# EAGLE board VCF_v15 (EAGLE 9.7.0)
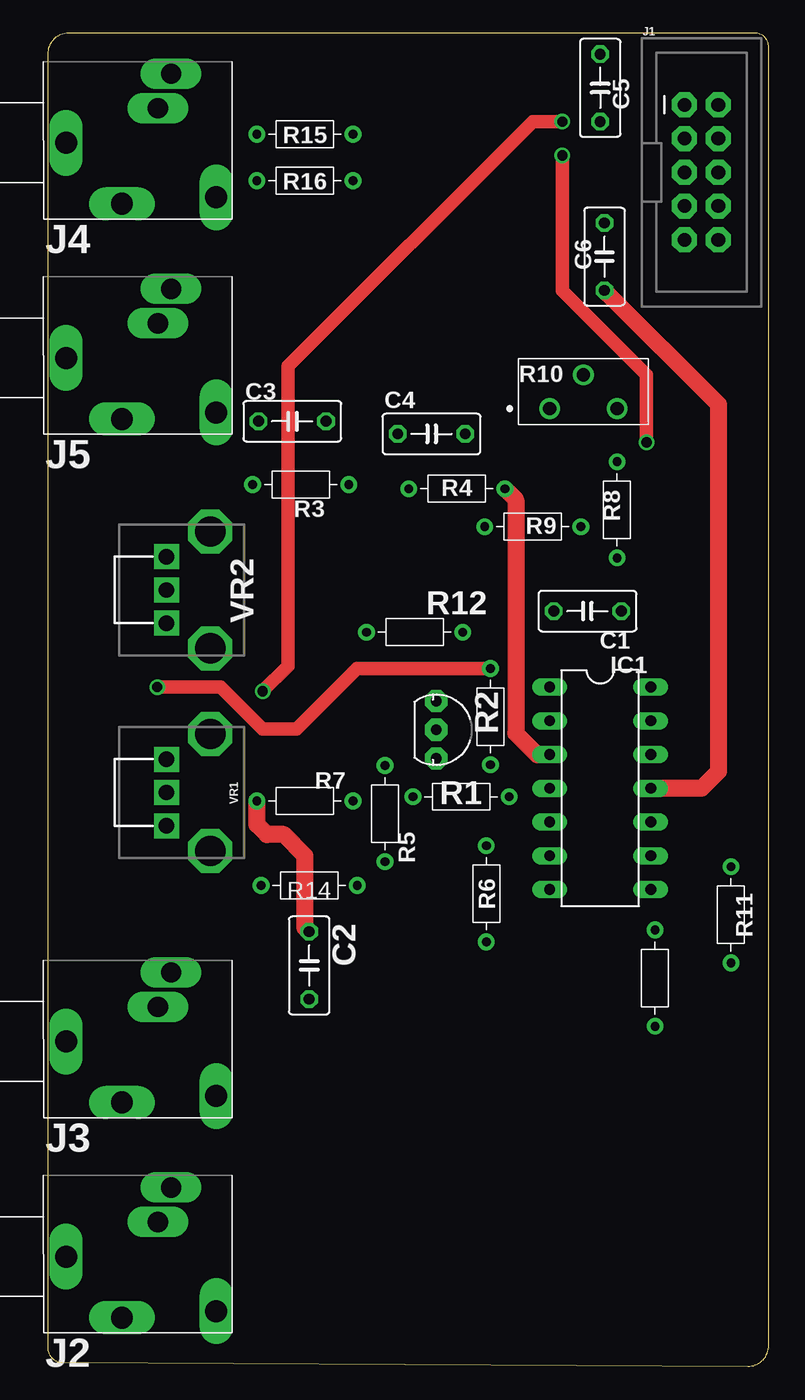
[diagram p0: board, top side]
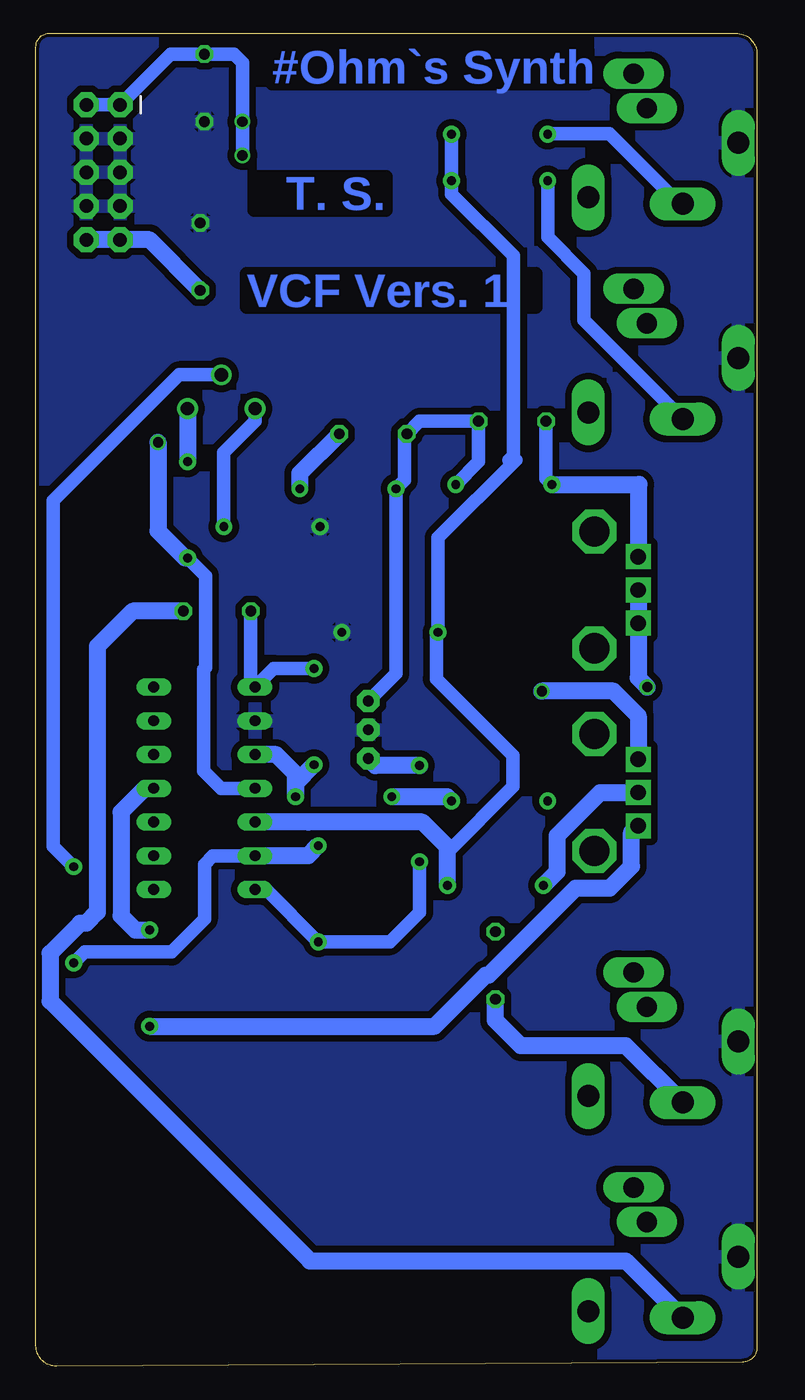
[diagram p1: board, bottom side, seen from below]

Size 54.27 x 100.32 mm. Coordinates in mm from the lower left corner, seen from the top.
Outline: 1.08,0.32 52.71,0 arc90 54.27,1.55 54.27,99.29 arc90 53.24,100.32 1.57,100.32 arc90 0,98.75 0,1.4 arc90 1.08,0.32
Copper layers (1*16): Top 0.035mm / dielectric 1.5mm / Bottom 0.035mm
Design rules "default *": minimum track width 6mil, minimum drill 0.35mm, track to track 20mil, track to pad 20mil, pad to pad 20mil, via to via 20mil, smd to smd 6mil, copper to edge 6mil, drill to drill 6mil, minimum pad ring 10mil, minimum via ring 8mil, stop-mask expansion 4mil, vias tented up to drill 0mil, thermal gap 10mil

## Footprints (pad centres in the part's own frame; a part is rotated, then mirrored left to right if it is on the bottom)
C050-030X075 = drill 0.813 octagon: 1 -2.54,0; 2 2.54,0
DIL14 = drill 0.813 long: 1 -7.62,-3.81; 2 -5.08,-3.81; 3 -2.54,-3.81; 4 0,-3.81; 5 2.54,-3.81; 6 5.08,-3.81; 7 7.62,-3.81; 8 7.62,3.81; 9 5.08,3.81; 10 2.54,3.81; 11 0,3.81; 12 -2.54,3.81; 13 -5.08,3.81; 14 -7.62,3.81
2X5-SHROUDED-NS = drill 1.016 pad 1.88 octagon: 1 -1.27,5.08; 2 1.27,5.08; 3 -1.27,2.54; 4 1.27,2.54; 5 -1.27,0; 6 1.27,0; 7 -1.27,-2.54; 8 1.27,-2.54; 9 -1.27,-5.08; 10 1.27,-5.08
PJ-324M = drill 1.651 pad 1.905 long: 1 -5.4,0; 4 5.9,-4.1; 5 -1.2,-4.6 | drill 1.524 pad 1.778 long: 2 2.5,5.2 | drill 1.524 pad 1.905 long: 3 1.5,2.6
RESAD724W46L381D178B = drill 0.66 pad 1.26: 1 -3.62,0; 2 3.62,0
PV36Z = drill 1 pad 1.564: 1 0,0; 2 2.54,2.54; 3 5.08,0
TO92-INLINE = drill 0.813 pad 1.676 octagon: 1 -2.159,0; 2 0,0; 3 2.159,0
POT-PTH-ALPS = drill 1.143 pad 1.88 square: P$1 7,-2.5; P$2 7,0; P$3 7,2.5 | drill 2.286 octagon: P$4 3.7,-4.4; P$5 3.7,4.4

## Placement (x,y rotation side)
C1  0.1u  [C050-030X075]  40.64,56.83 180 top
C2  0.1u  [C050-030X075]  19.68,30.16 90 top
C3  4.7n  [C050-030X075]  18.41,71.12 0 top
C4  4.7n  [C050-030X075]  28.89,70.17 0 top
C5  10u  [C050-030X075]  41.59,96.2 270 top
C6  10u  [C050-030X075]  41.91,83.5 270 top
IC1  TL074P  [DIL14]  41.59,43.5 270 top
J1  [2X5-SHROUDED-NS]  49.21,89.85 0 top
J2  AUDIO_JACK_PJ-324M  [PJ-324M]  6.79,8.25 0 top
J3  AUDIO_JACK_PJ-324M  [PJ-324M]  6.79,24.45 0 top
J4  AUDIO_JACK_PJ-324M  [PJ-324M]  6.79,92.07 0 top
J5  AUDIO_JACK_PJ-324M  [PJ-324M]  6.79,75.88 0 top
R1  5M  [RESAD724W46L381D178B]  31.11,42.86 180 top
R2  3M  [RESAD724W46L381D178B]  33.34,48.89 90 top
R3  1M  [RESAD724W46L381D178B]  19.05,66.36 0 top
R4  1M  [RESAD724W46L381D178B]  30.8,66.04 0 top
R5  100k  [RESAD724W46L381D178B]  25.4,41.59 270 top
R6  100k  [RESAD724W46L381D178B]  33.02,35.56 270 top
R7  5M  [RESAD724W46L381D178B]  19.37,42.54 180 top
R8  100k  [RESAD724W46L381D178B]  42.86,64.45 90 top
R9  1k  [RESAD724W46L381D178B]  36.51,63.18 0 top
R10  10k  [PV36Z]  37.78,72.07 0 top
R11  10k  [RESAD724W46L381D178B]  51.44,33.97 270 top
R12  1k  [RESAD724W46L381D178B]  27.62,55.24 180 top
R13  50k  [RESAD724W46L381D178B]  45.72,29.21 90 top
R14  150k  [RESAD724W46L381D178B]  19.68,36.19 180 top
R15  100k  [RESAD724W46L381D178B]  19.37,92.71 180 top
R16  150k  [RESAD724W46L381D178B]  19.37,89.22 180 top
U$1  JFET_PN4391_GSD  [TO92-INLINE]  29.25,47.9 270 top
VR1  100k  [POT-PTH-ALPS]  15.94,43.18 180 top
VR2  100k  [POT-PTH-ALPS]  15.94,58.42 180 top

## Library data of the parts
C1-C6 = adafruit
IC1 = linear
J1 = SparkFun-Connectors; PROD_ID: CONN-08671; SF_ID: PRT-08506
J2-J5 = Synthesizer v25
R1-R9 R11-R16 = Resistor; CATEGORY: Resistor; SUB-CATEGORY: Fixed
R10 = Resistor; CATEGORY: Resistor; DESCRIPTION: Lead Sealed Type Multiturn PV36 Series; MANUFACTURER: BOURNS; MPN: PV36Z; OPERATING_TEMPERATURE: -55 to +125 °C; PART_STATUS: Active; ROHS_COMPLIANCE: RoHS Compliant; SERIES: PV36; SUB-CATEGORY: Trimpot; TYPE: Lead Sealed
U$1 = Synthesizer v26
VR1 VR2 = Synthesizer v25; PROD_ID: RES-09177; SF_SKU: COM-09288

## Nets
+12V: C5.1 IC1.4 J1.1 J1.2 R8.1 VR1.P$1
-12V: C6.2 IC1.11 J1.9 J1.10 R13.2
AGND: C5.2 C6.1 IC1.2 J1.3 J1.4 J1.5 J1.6 J1.7 J1.8 J2.1 J3.1 J4.1 J5.1 R9.1 R12.1 U$1.2
AUDIO_IN: C2.1 J3.5
AUDIO_OUT: C1.1 J2.5
CV1: J4.5 R15.2
CV2: J5.5 R16.2
D: C3.2 C4.1 R3.2 R4.1 U$1.1
G: R5.1 U$1.3
N$1: IC1.7 R5.2 R6.2
N$2: C2.2 R7.2
N$3: C4.2 IC1.3 R1.1 R2.1 R4.2
N$4: R13.1 VR1.P$3
N$5: C1.2 IC1.1 R2.2 VR2.P$2 VR2.P$3
N$7: R1.2 R7.1
N$8: C3.1 R3.1 VR2.P$1
N$9: IC1.6 R6.1 R11.2
N$10: IC1.5 R12.2 R14.1 R15.1 R16.1
N$11: R8.2 R10.3
N$12: R9.2 R10.1
N$13: R10.2 R11.1
N$18: R14.2 VR1.P$2

## Tracks (layer width: path | path; a pad name or v marks a point on that pad's centre or on a via)
+12V  (via drill 0.76)
  Top 1.016: v45.09,69.53 45.09,74.61 38.73,80.96 v38.73,91.12 | v16.19,50.8 18.1,52.7 18.1,75.25 36.51,93.66 v38.73,93.66
  Bottom 1.016: J1.2 J1.1 44.13,98.74 C5.1 39.37,98.74 38.73,98.11 v38.73,93.66 v38.73,91.12 | IC1.4 40.32,43.5 41.64,44.82 41.64,52.44 41.5,52.58 41.5,59.47 R8.1
  Bottom 1.27: R8.1 43.05,60.83 45.09,62.86 v45.09,69.53 | VR1.P$1 8.94,48.94 10.79,50.8 v16.19,50.8
-12V
  Top 1.27: C6.2 50.48,72.39 50.48,44.77 49.21,43.5 IC1.11 45.09,43.5
  Bottom 1.27: R13.2 46.8,32.83 47.87,33.89 47.87,41.7 46.07,43.5 IC1.11 45.09,43.5 | C6.2 45.72,84.77 J1.9 J1.10
AGND
  pour Bottom (isolate 0.254): -8.38,-16.64 66.17,-16.64 66.17,107.76 -8.38,107.76
AUDIO_IN
  Bottom 1.27: J3.5 9.87,24.13 17.78,24.13 19.68,26.03 C2.1
AUDIO_OUT
  Bottom 1.27: C1.1 46.99,56.83 49.64,54.18 49.64,34.17 50.48,33.34 50.96,33.34 53.21,31.08 53.21,27.49 33.66,7.94 9.87,7.94 J2.5
CV1
  Bottom 1.016: R15.2 15.72,92.74 11.12,92.74 5.86,87.47 J4.5
CV2
  Bottom 1.016: J5.5 13.02,78.71 13.02,82.23 15.75,84.96 R16.2
D
  Bottom 1.016: R3.2 20.95,68.07 C3.2 25.4,71.12 C4.1 26.54,70.17 26.54,66.67 R4.1 27.18,52.13 U$1.1
G
  Bottom 1.27: R5.1 28.72,45.21 U$1.3
N$1
  Bottom 1.016: IC1.7 36.96,35.88 R6.2 27.62,31.94 25.4,34.16 R5.2
N$2
  Top 1.27: C2.2 19.37,33.02 19.37,38.42 17.78,40 16.51,40 15.75,40.77 R7.2
N$3
  Top 1.27: R4.2 35.24,65.21 35.24,47.62 36.83,46.04 IC1.3 38.1,46.04
  Bottom 1.27: R2.1 34.73,43.88 R1.1 34.73,44.58 36.2,46.04 IC1.3 | C4.2 34.42,67.18 R4.2
N$4
  Bottom 1.27: VR1.P$3 9.45,40.17 9.45,37.62 11.08,35.98 13.63,35.98 20.2,29.42 20.43,29.42 24.27,25.59 R13.1
N$5  (via drill 0.76)
  Top 1.016: v8.26,51.12 13.02,51.12 16.19,47.94 18.73,47.94 23.3,52.51 R2.2
  Bottom 1.016: C1.2 38.1,51.43 IC1.1 36.38,52.51 R2.2
  Bottom 1.27: VR2.P$2 VR2.P$3 8.94,51.8 v8.26,51.12
N$7
  Bottom 1.27: R7.1 23.3,42.86 R1.2
N$8
  Bottom 1.016: C3.1 15.88,66.8 R3.1 | 8.89,66.36 8.94,66.3
  Bottom 1.27: 8.94,66.3 VR2.P$1 | R3.1 8.89,66.36
N$9
  Bottom 1.016: IC1.6 40.96,38.42 41.59,37.78 41.59,33.65 44.07,31.18 50.61,31.18 R11.2
  Bottom 1.27: R6.1 33.78,38.42 IC1.6
N$10
  Bottom 1.016: R15.1 R16.1 22.99,88.22 18.33,83.56 18.33,68.54 18.67,68.2 18.16,68.2 24,62.36 R12.2 24,55.07 24.12,54.95 24.12,51.73 18.35,45.96 18.35,43.64 23.3,38.68 R14.1
  Bottom 1.27: IC1.5 33.76,40.96 25.18,40.96 23.3,39.08 R14.1
N$11
  Bottom 1.27: R10.3 R8.2
N$12
  Bottom 1.016: R10.1 37.78,71.12 40.13,68.77 R9.2
N$13
  Bottom 1.016: R10.2 43.5,74.61 52.96,65.15 52.96,39.11 R11.1
N$18
  Bottom 1.27: R14.2 15.04,37.22 15.04,39.94 11.79,43.18 VR1.P$2

## Text on the board
Bottom: #Ohm`s Synth | T. S. | VCF Vers. 1